# EAGLE board Lazerade_ChevronMCU (EAGLE 8.4.3)
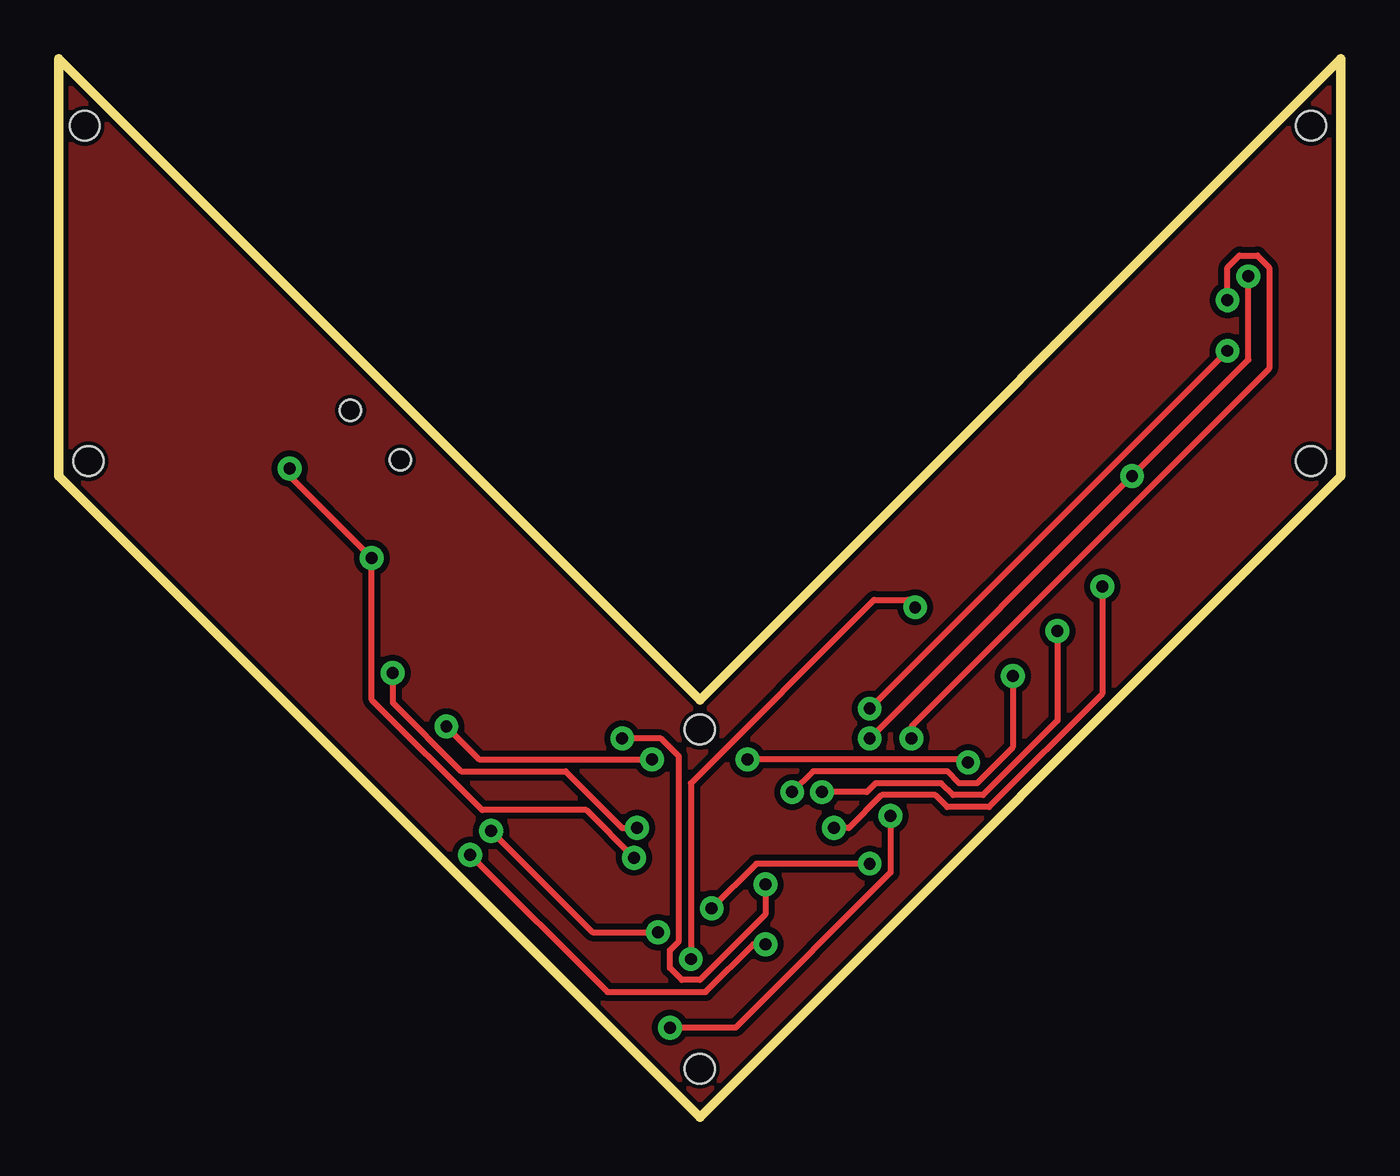
[diagram p0: board, top side]
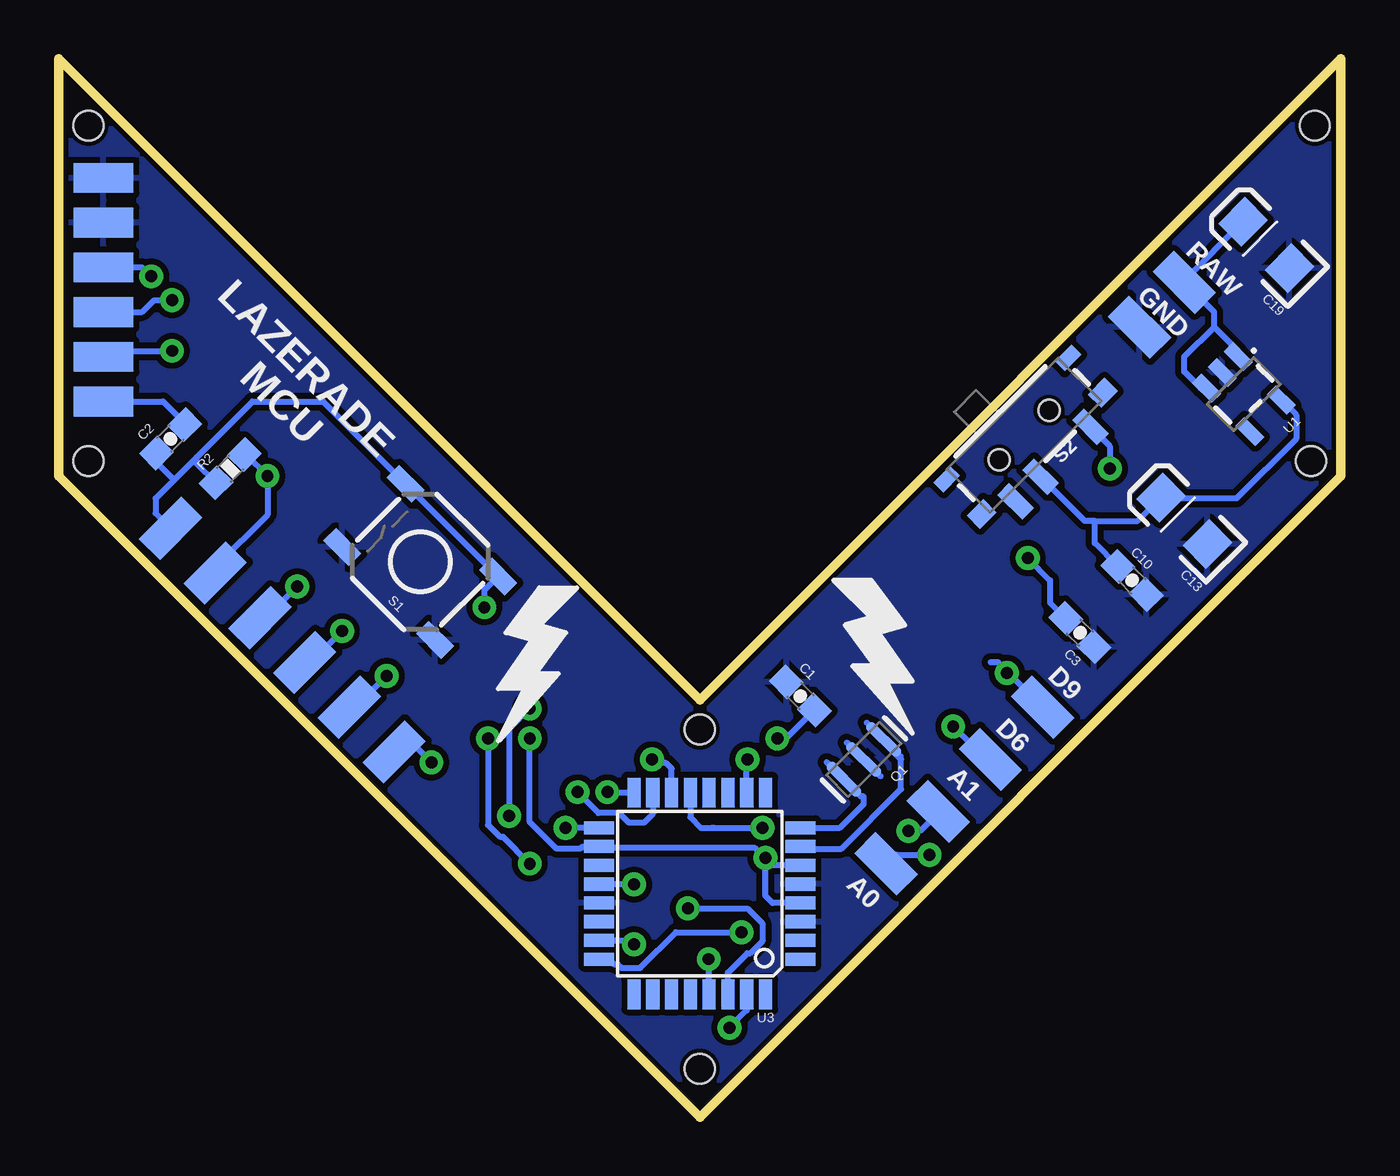
[diagram p1: board, bottom side, seen from below]

Size 54.61 x 45.09 mm. Coordinates in mm from the lower left corner, seen from the top.
Outline: 0,45.09 0,27.3 27.3,0 54.61,27.3 54.61,45.09 27.3,17.78 0,45.09
Copper layers (1*16): Top 0.035mm / dielectric 0.15mm / Bottom 0.035mm
Design rules "SparkFun-2-layer-STANDARD *": minimum track width 10mil, minimum drill 20mil, track to track 10mil, track to pad 8mil, pad to pad 8mil, via to via 10mil, smd to smd 8mil, copper to edge 8mil, drill to drill 8mil, minimum pad ring 10mil, minimum via ring 10mil, stop-mask expansion 4mil, vias tented up to drill 25mil, thermal gap 10mil
Net classes: 0 default: width 0.203 mm; 1 vcc: width 0.254 mm
Holes 1.27 mm at 1.11,42.23 1.27,27.94 53.34,27.94 53.34,42.23 27.3,2.06 27.3,16.51

## Footprints (pad centres in the part's own frame; a part is rotated, then mirrored left to right if it is on the bottom)
0603-CAP = smd 1.1 x 1: 1 -0.85,0; 2 0.85,0
EIA3216 = smd 1.4 x 1.6: A 1.4,0; C -1.4,0
RESONATOR-SMD-1:1 = smd 0.45 x 1.905: 1 -1.2,0; 2 0,0; 3 1.2,0
0603-RES = smd 1.1 x 1: 1 -0.85,0; 2 0.85,0
TACTILE-SWITCH-SMD-ALT01 = smd 1.524 x 0.762: 1 -2.794,1.905; 2 2.794,1.905; 3 -2.794,-1.905; 4 2.794,-1.905
SWITCH_SPST_SMD_A = smd 0.7 x 1.5: 1 -2.25,-1.75; 2 -0.75,-1.75; 3 2.25,-1.75 | smd 1 x 0.6: GND1 -3.65,1; GND3 3.65,1 | smd 1 x 0.8: GND2 -3.65,-1.1; GND4 3.65,-1.1 | hole 0.9: -1.5,0; 1.5,0
SOT23-5 = smd 0.55 x 1.2: 1 -0.95,-1.3; 2 0,-1.3; 3 0.95,-1.3; 4 0.95,1.3; 5 -0.95,1.3
TQFP32-08 = smd 1.27 x 0.559: 1 -4.293,2.8; 2 -4.293,2; 3 -4.293,1.2; 4 -4.293,0.4; 5 -4.293,-0.4; 6 -4.293,-1.2; 7 -4.293,-2; 8 -4.293,-2.8; 17 4.293,-2.8; 18 4.293,-2; 19 4.293,-1.2; 20 4.293,-0.4; 21 4.293,0.4; 22 4.293,1.2; 23 4.293,2; 24 4.293,2.8 | smd 0.559 x 1.27: 9 -2.8,-4.293; 10 -2,-4.293; 11 -1.2,-4.293; 12 -0.4,-4.293; 13 0.4,-4.293; 14 1.2,-4.293; 15 2,-4.293; 16 2.8,-4.293; 25 2.8,4.293; 26 2,4.293; 27 1.2,4.293; 28 0.4,4.293; 29 -0.4,4.293; 30 -1.2,4.293; 31 -2,4.293; 32 -2.8,4.293
SINLGE_PAD_CONNECT = smd 2.54 x 1.27: P$1 0,0

## Placement (x,y rotation side)
C1  0.1uF  [0603-CAP]  23.02,17.94 315 bottom
C2  0.1uF  [0603-CAP]  49.85,28.89 45 bottom
C3  0.1uF  [0603-CAP]  11.11,20.64 135 bottom
C10  0.1uF  [0603-CAP]  8.89,22.86 315 bottom
C13  10uF  [EIA3216]  6.67,25.4 135 bottom
C19  10uF  [EIA3216]  3.17,37.15 135 bottom
FRAME1  FRAME-LETTER  [CREATIVE_COMMONS]  -3.17,-17.46 0 top  (outside the outline)
Q1  8/16/20MHz  [RESONATOR-SMD-1:1]  20.32,15.24 225 bottom
R2  10K  [0603-RES]  47.31,27.62 45 bottom
S1  Reset  [TACTILE-SWITCH-SMD-ALT01]  39.21,23.65 135 bottom
S2  [SWITCH_SPST_SMD_A]  13.49,29.05 45 bottom
U1  3.3V/150mA  [SOT23-5]  4.13,30.8 225 bottom
U3  ATMEGA328  [TQFP32-08]  27.3,9.53 180 bottom
U$1  LAZERADE_SINGLE_CONN  [SINLGE_PAD_CONNECT]  19.37,10.8 315 bottom
U$2  LAZERADE_SINGLE_CONN  [SINLGE_PAD_CONNECT]  17.14,13.02 315 bottom
U$3  LAZERADE_SINGLE_CONN  [SINLGE_PAD_CONNECT]  14.92,15.24 315 bottom
U$4  LAZERADE_SINGLE_CONN  [SINLGE_PAD_CONNECT]  12.7,17.46 315 bottom
U$5  LAZERADE_SINGLE_CONN  [SINLGE_PAD_CONNECT]  6.67,35.56 315 bottom
U$6  LAZERADE_SINGLE_CONN  [SINLGE_PAD_CONNECT]  8.57,33.66 315 bottom
U$7  LAZERADE_SINGLE_CONN  [SINLGE_PAD_CONNECT]  47.94,23.18 45 bottom
U$8  LAZERADE_SINGLE_CONN  [SINLGE_PAD_CONNECT]  46.04,21.27 45 bottom
U$9  LAZERADE_SINGLE_CONN  [SINLGE_PAD_CONNECT]  42.23,17.46 45 bottom
U$10  LAZERADE_SINGLE_CONN  [SINLGE_PAD_CONNECT]  44.13,19.37 45 bottom
U$11  LAZERADE_SINGLE_CONN  [SINLGE_PAD_CONNECT]  40.32,15.56 45 bottom
U$12  LAZERADE_SINGLE_CONN  [SINLGE_PAD_CONNECT]  49.85,25.08 45 bottom
U$13  LAZERADE_SINGLE_CONN  [SINLGE_PAD_CONNECT]  52.7,40.01 0 bottom
U$14  LAZERADE_SINGLE_CONN  [SINLGE_PAD_CONNECT]  52.7,38.1 0 bottom
U$15  LAZERADE_SINGLE_CONN  [SINLGE_PAD_CONNECT]  52.7,36.2 0 bottom
U$16  LAZERADE_SINGLE_CONN  [SINLGE_PAD_CONNECT]  52.7,34.29 0 bottom
U$17  LAZERADE_SINGLE_CONN  [SINLGE_PAD_CONNECT]  52.7,32.38 0 bottom
U$18  LAZERADE_SINGLE_CONN  [SINLGE_PAD_CONNECT]  52.7,30.48 0 bottom

## Library data of the parts
C1-C3 C10 C13 C19 R2 U3 = SparkFun
FRAME1 = SparkFun-Aesthetics
Q1 S1 = Testing
S2 = SparkFun-Switches; PROD_ID: SWCH-10651; SF_SKU: COM-10860
U1 = SparkFun-IC-Power; PROD_ID: VREG-00822
U$1-U$18 = Lazerade_Connectors

## Nets
A0: U3.23 U$1.P$1
A1: U3.24 U$2.P$1
A2: U3.25
A3: U3.26
A6: U3.19
A7: U3.22
AREF: C1.2 U3.20
D2: U3.32
D3: U3.1
D4: U3.2
D5: U3.9
D6: U3.10 U$3.P$1
D7: U3.11
D8: U3.12
D9: U3.13 U$4.P$1
D10: U3.14 U$11.P$1
DTR: C2.2 U$18.P$1
GND [vcc]: C1.1 C3.1 C10.2 C13.C C19.C Q1.2 S1.1 S1.2 U1.2 U3.3 U3.5 U3.21 U$6.P$1 U$13.P$1 U$14.P$1
MISO: U3.16 U$9.P$1
MOSI: U3.15 U$10.P$1
N$3: Q1.3 U3.8
N$4: Q1.1 U3.7
RAW [vcc]: C19.A U1.1 U1.3 U$5.P$1
RESET: C2.1 R2.1 S1.3 S1.4 U3.29 U$12.P$1
RXI: U3.30 U$16.P$1
SCK: U3.17 U$8.P$1
TXO: U3.31 U$17.P$1
VCC: C3.2 R2.2 S2.3 U3.4 U3.6 U3.18 U$7.P$1 U$15.P$1
VOUT: C10.1 C13.A S2.2 U1.5

## Tracks (layer width: path | path; a pad name or v marks a point on that pad's centre or on a via)
A0  (via drill 0.51)
  Top 0.254: v30.1,7.37 29.59,7.37 27.56,5.33 23.37,5.33 v17.53,11.18
  Bottom 0.254: v17.53,11.18 18.92,11.18 19.3,10.8 U$1.P$1 | U3.23 30.26,7.53 v30.1,7.37
A1  (via drill 0.51)
  Top 0.254: v25.53,7.87 22.73,7.87 v18.42,12.19
  Bottom 0.254: v25.53,7.87 28.32,7.87 29.85,6.35 30.64,6.35 30.8,6.51 30.96,6.51 31.17,6.72 U3.24 | v18.42,12.19 17.91,12.19 17.14,12.95 U$2.P$1
AREF  (via drill 0.51)
  Top 0.254: v24,16.13 25.65,16.13 26.42,15.37 26.42,7.49 26.04,7.11 26.04,6.35 26.54,5.84 27.3,5.84 30.1,8.64 v30.1,9.91
  Bottom 0.254: C1.2 23.63,16.13 v24,16.13 | U3.20 30.12,9.93 v30.1,9.91
D6  (via drill 0.51)
  Top 0.254: v25.27,15.24 17.91,15.24 v16.51,16.64
  Bottom 0.254: v16.51,16.64 15.11,15.24 U$3.P$1 | U3.10 25.3,15.21 v25.27,15.24
D9  (via drill 0.51)
  Top 0.254: v24.64,12.32 24,12.32 21.59,14.73 17.14,14.73 14.22,17.65 v14.22,18.92
  Bottom 0.254: U$4.P$1 14.19,18.95 | 14.19,18.95 14.6,19.37 14.92,19.37 | 26.67,12.32 v24.64,12.32 | 26.67,12.32 26.8,12.32 | v14.22,18.92 14.19,18.95 | U3.13 27.71,12.78 27.24,12.32 26.67,12.32
D10  (via drill 0.51)
  Top 0.254: v29.34,15.24 38.61,15.24 v38.73,15.11
  Bottom 0.254: v38.73,15.11 39.37,15.75 40.13,15.75 U$11.P$1 | U3.14 28.51,14.85 28.73,15.08 29.18,15.08 v29.34,15.24
DTR
  Bottom 0.254: C2.2 49.25,29.56 50.16,30.48 U$18.P$1
GND
  pour Top: 0,45.09 0,27.3 27.3,0 54.61,27.3 54.61,45.09 27.3,17.78
  pour Bottom: 0,45.09 0,27.3 27.3,0 54.61,27.3 54.61,45.09 27.3,17.78
MISO  (via drill 0.51)
  Top 0.254: v31.24,13.84 32.13,14.73 37.85,14.73 38.35,14.22 39.12,14.22 40.64,15.75 v40.64,18.8
  Bottom 0.254: v40.64,18.8 41.91,17.53 42.16,17.53 U$9.P$1 | U3.16 31.22,13.82 v31.24,13.84
MOSI  (via drill 0.51)
  Top 0.254: v32.51,13.84 34.42,13.84 34.8,14.22 37.59,14.22 38.1,13.72 39.37,13.72 42.55,16.89 v42.55,20.7
  Bottom 0.254: v32.51,13.84 31.62,12.95 30.73,12.95 30.32,12.54 29.69,12.54 29.3,12.92 U3.15 | v42.55,20.7 43.81,19.43 44.07,19.43 U$10.P$1
N$3
  Bottom 0.254: Q1.3 20.43,13.65 20.32,13.65 20.32,13.34 21.33,12.32 U3.8
N$4
  Bottom 0.254: Q1.1 19.47,15.98 18.73,15.24 18.73,13.97 21.27,11.43 22.92,11.43 U3.7
RAW
  Bottom 0.254: U1.1 4.38,32.63 5.4,33.66 | 5.4,33.66 5.4,34.29 U$5.P$1 6.67,35.63 C19.A | U1.3 5.96,31.04 6.67,31.75 6.67,32.38 5.4,33.66
RESET  (via drill 0.51)
  Top 0.254: v26.92,6.73 26.92,14.22 34.73,22.03 36.16,22.03 v36.48,21.72
  Bottom 0.254: 39.83,26.97 S1.4 39.77,26.91 | 48.74,28.1 46.36,30.48 43.34,30.48 39.77,26.91 | 49.69,27.15 48.74,28.1 | 49.69,27.15 50.48,26.35 50.48,25.72 U$12.P$1 | R2.1 48.74,27.85 48.74,28.1 | C2.1 50.45,27.91 49.69,27.15 | U3.29 26.91,6.71 v26.92,6.73 | 39.77,26.91 S1.3 36.48,22.43 v36.48,21.72
RXI  (via drill 0.51)
  Top 0.254: v27.81,8.89 29.72,10.8 v34.54,10.8 | v36.32,16.13 36.32,16.64 51.56,31.88 51.56,36.2 51.05,36.7 50.29,36.7 49.78,36.2 v49.78,34.8
  Bottom 0.254: v27.81,8.89 25.27,8.89 24.64,8.25 24.64,7.49 25.15,6.99 25.27,6.99 26.11,6.15 U3.30 | v34.54,10.8 35.69,11.94 35.81,11.94 36.32,12.45 v36.32,16.13 | v49.78,34.8 50.55,34.8 51.05,34.29 U$16.P$1
SCK  (via drill 0.51)
  Top 0.254: v33.02,12.32 33.66,12.32 35.05,13.72 37.34,13.72 37.85,13.21 39.62,13.21 44.45,18.03 v44.45,22.61
  Bottom 0.254: v44.45,22.61 45.72,21.34 45.97,21.34 U$8.P$1 | U3.17 v33.01,12.32 v33.02,12.32
TXO  (via drill 0.51)
  Top 0.254: v26.04,3.81 28.83,3.81 35.43,10.41 v35.43,12.83 | v49.78,32.64 v34.54,17.4
  Bottom 0.254: v35.43,12.83 35.43,16.51 v34.54,17.4 | v49.78,32.64 52.45,32.64 U$17.P$1 | U3.31 25.3,4.54 v26.04,3.81
VCC  (via drill 0.51)
  Top 0.254: v9.84,27.62 9.84,27.3 v13.33,23.81 13.33,17.78 18.03,13.08 22.48,13.08 v24.51,11.05 | v50.67,35.81 50.67,32.26 v45.72,27.3 v34.54,16.13
  Bottom 0.254: S2.3 9.84,28.58 v9.84,27.62 | v13.33,23.81 12.38,22.86 12.38,21.91 C3.2 | C3.2 | U$7.P$1 47.88,23.24 47.88,23.49 45.72,25.65 v45.72,27.3 46.64,28.22 R2.2 | U$15.P$1 51.05,36.2 v50.67,35.81 | 24.53,11.03 v24.51,11.05 | 24.53,11.03 24.57,10.98 24.51,10.92 24.51,10.8 | v34.54,16.13 34.54,12.57 33.4,11.43 32.38,11.43 32.29,11.52 U3.18 31.53,11.46 24.96,11.46 24.53,11.03 | U3.6 24.44,10.73 24.51,10.8 | U3.4 24.21,9.12 24.51,9.43 24.51,10.8
VOUT
  Bottom 0.254: U1.5 1.91,29.92 1.91,28.89 4.45,26.35 7.62,26.35 C13.A 8.65,25.4 10.48,25.4 | S2.2 10.9,25.4 10.48,25.4 | C10.1 10.48,24.45 10.48,25.4

## Text on the board
bPlace: RAW | GND | LAZERADE | MCU | D9 | D6 | A1 | A0